# EAGLE board BR-Client-v1.0 (EAGLE 5.03)
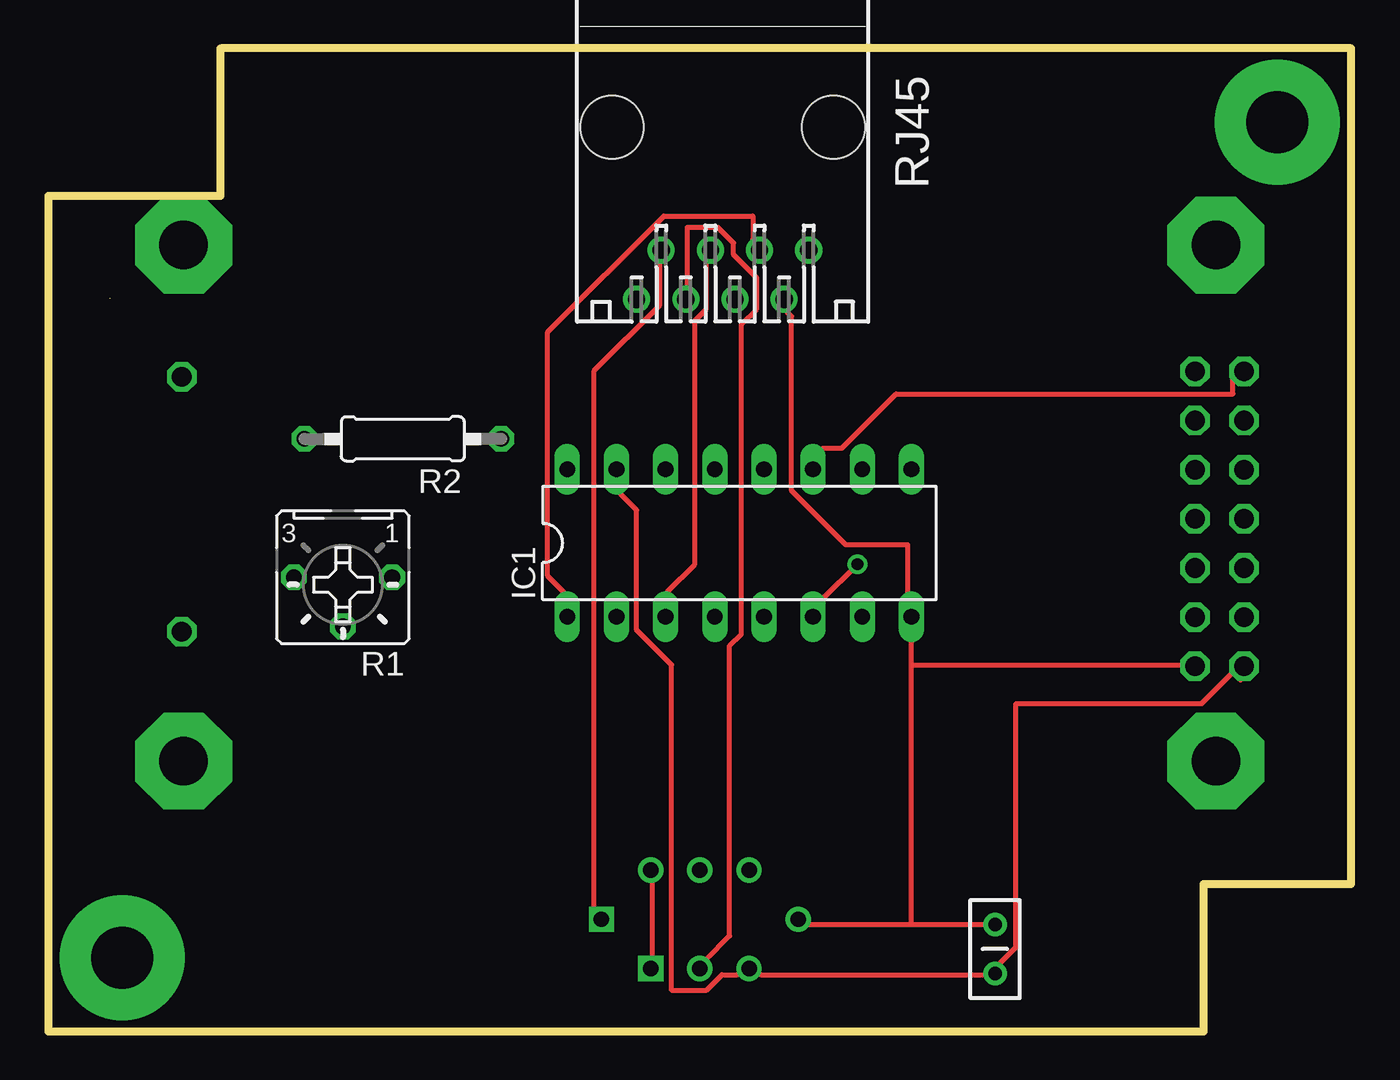
[diagram p0: board, top side]
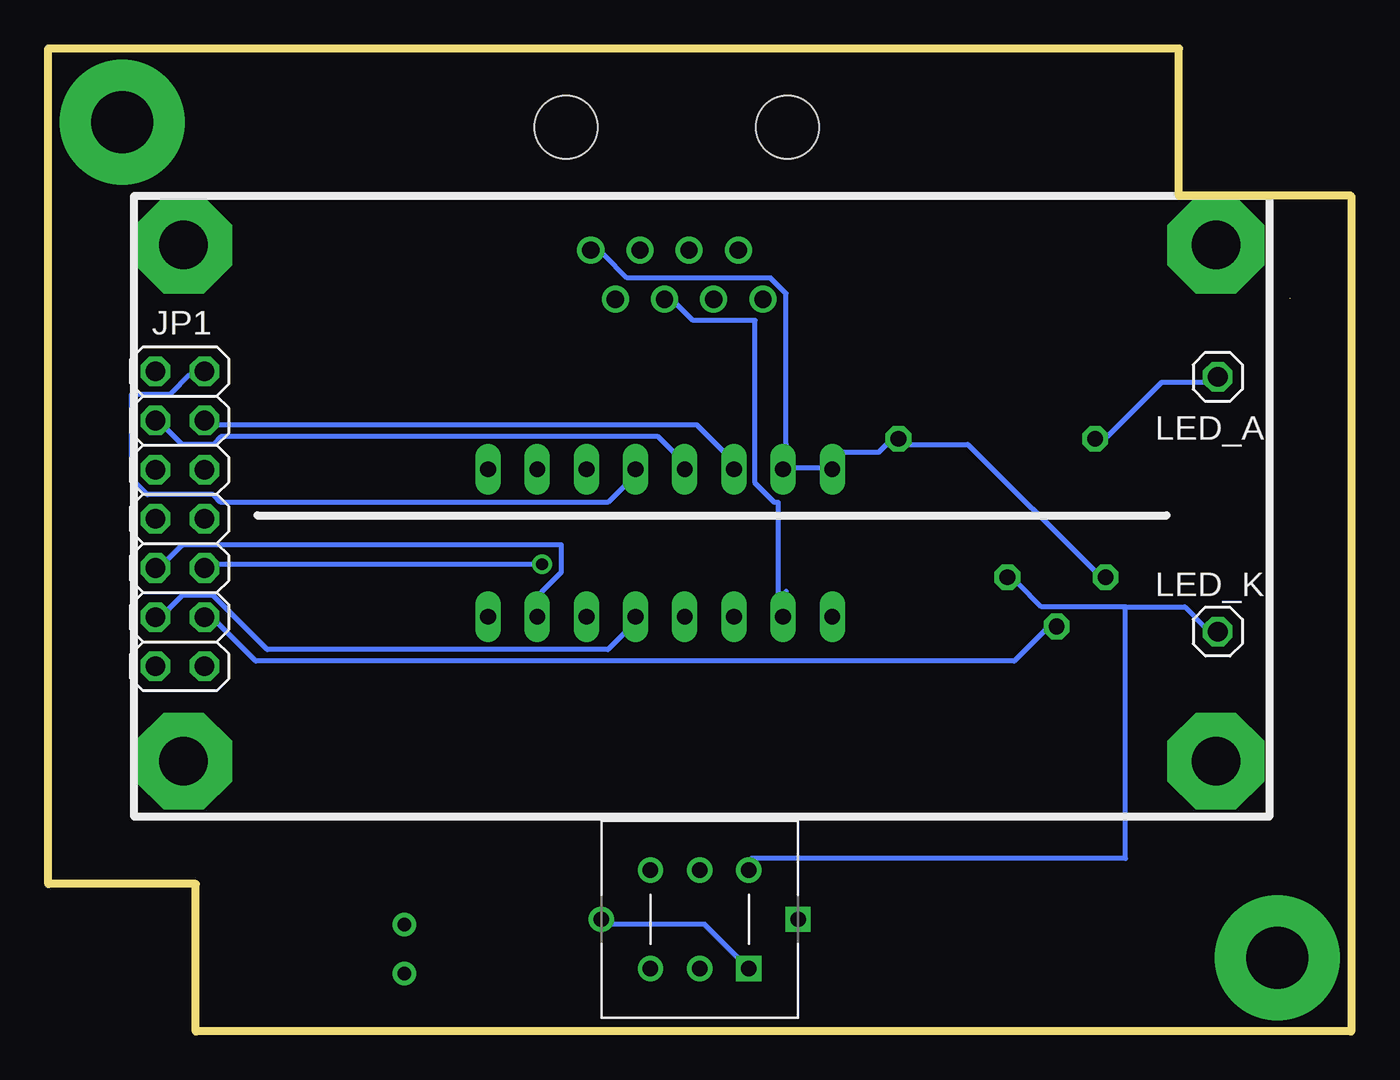
[diagram p1: board, bottom side, seen from below]

Size 67.31 x 50.8 mm. Coordinates in mm from the lower left corner, seen from the top.
Outline: 3.17,37.89 3.17,37.88
Outline: 0,43.18 8.89,43.18 8.89,50.8 67.31,50.8 67.31,7.62 59.69,7.62 59.69,0 0,0 0,43.18
Copper layers (1*16): Top 0.035mm / dielectric 1.5mm / Bottom 0.035mm
Design rules "default": minimum track width 10mil, minimum drill 24mil, track to track 8mil, track to pad 8mil, pad to pad 8mil, via to via 8mil, smd to smd 8mil, copper to edge 40mil, drill to drill 8mil, minimum pad ring 10mil, minimum via ring 8mil, stop-mask expansion 4mil, vias tented up to drill 0mil, thermal gap 10mil

## Footprints (pad centres in the part's own frame; a part is rotated, then mirrored left to right if it is on the bottom)
CAP-PTH-SMALL2 = drill 0.7 round: 1 0,0; 2 2.54,0
DIL16 = drill 0.813 long: 1 -8.89,-3.81; 2 -6.35,-3.81; 3 -3.81,-3.81; 4 -1.27,-3.81; 5 1.27,-3.81; 6 3.81,-3.81; 7 6.35,-3.81; 8 8.89,-3.81; 9 8.89,3.81; 10 6.35,3.81; 11 3.81,3.81; 12 1.27,3.81; 13 -1.27,3.81; 14 -3.81,3.81; 15 -6.35,3.81; 16 -8.89,3.81
2X07 = drill 1.016 octagon: 1 -7.62,-1.27; 2 -7.62,1.27; 3 -5.08,-1.27; 4 -5.08,1.27; 5 -2.54,-1.27; 6 -2.54,1.27; 7 0,-1.27; 8 0,1.27; 9 2.54,-1.27; 10 2.54,1.27; 11 5.08,-1.27; 12 5.08,1.27; 13 7.62,-1.27; 14 7.62,1.27
1X01 = drill 1.016 octagon: 1 0,0
PB613 = drill 0.8 square: 1 -2.54,2.54; L1 -5.08,0 | drill 0.8 round: 2 0,2.54; 3 2.54,2.54; 4 -2.54,-2.54; 5 0,-2.54; 6 2.54,-2.54; L2 5.08,0
B25P = drill 0.813 octagon: A -2.54,0; E 2.54,0; S 0,2.54
0207/10 = drill 0.813 octagon: 1 -5.08,0; 2 5.08,0
555164-1 = drill 0.889 round: 1 -4.445,5.207; 2 -3.175,7.747; 3 -1.905,5.207; 4 -0.635,7.747; 5 0.635,5.207; 6 1.905,7.747; 7 3.175,5.207; 8 4.445,7.747 | hole 3.251: -5.715,-1.143; 5.715,-1.143

## Placement (x,y rotation side)
C1  0.1mF  [CAP-PTH-SMALL2]  48.91,5.53 270 top
IC1  4094N  [DIL16]  35.7,25.24 0 top
JP1  [2X07]  60.51,26.49 90 bottom
LED_A  [1X01]  6.89,33.83 0 bottom
LED_K  [1X01]  6.89,20.66 0 bottom
LEDBTN  PB613DIP  [PB613]  33.66,5.8 180 bottom
R1  22k  [B25P]  15.22,23.47 180 top
R2  10k  [0207/10]  18.31,30.62 180 top
RJ45  [555164-1]  34.84,45.58 180 top

## Library data of the parts
C1 = SparkFun
IC1 = 40xx
JP1 LED_A LED_K = pinhead
LEDBTN = Vermut
R1 = pot
R2 = resistor
RJ45 = con-amp

## Nets
D4: IC1.14 JP1.11
D5: IC1.13 JP1.12
D6: IC1.12 JP1.13
D7: IC1.11 JP1.14
E: IC1.7 JP1.6
N$1: LEDBTN.2 RJ45.6
N$2: LEDBTN.L1 RJ45.7
N$3: LED_A.1 R2.2
N$10: IC1.1 RJ45.3
N$11: IC1.2 RJ45.4
N$12: IC1.3 RJ45.5
RS: IC1.5 JP1.4
RW: IC1.6 JP1.5
VDD: C1.2 IC1.15 IC1.16 JP1.2 LEDBTN.3 R1.E R2.1 RJ45.1
VSS: C1.1 IC1.8 JP1.1 LED_K.1 LEDBTN.1 LEDBTN.4 LEDBTN.L2 R1.A RJ45.2
VSTR: JP1.3 R1.S

## Tracks (layer width: path | path; a pad name or v marks a point on that pad's centre or on a via)
D4
  Bottom 0.254: IC1.14 32.4,29.94 33.8,31.34 58.6,31.34 JP1.11
D5
  Bottom 0.254: IC1.13 35,29.94 35.8,30.74 58.4,30.74 58.8,30.34 60.4,30.34 61.2,31.14 JP1.12
D6
  Bottom 0.254: IC1.12 37.6,28.14 38.4,27.34 58.4,27.34 58.8,27.74 62.2,27.74 63,28.54 63,32.94 61,32.94 60,33.94 JP1.13
D7
  Top 0.254: IC1.11 40,30.14 41,30.14 43.8,32.94 61.2,32.94 61.2,33.74 JP1.14
E
  Bottom 0.254: IC1.7 41.8,22.74 40.8,23.74 40.8,25.14 60.4,25.14 61.2,24.34 JP1.6
N$1
  Top 0.254: LEDBTN.2 34,3.74 35.2,4.94 35.2,19.94 35.8,20.54 35.8,36.54 36.6,37.34 36.6,38.94 35.4,40.14 35.4,40.74 34.6,41.54 33,41.54 33,38.34 RJ45.6
N$2
  Top 0.254: LEDBTN.L1 28.2,6.34 28.2,34.14 31.6,37.54 31.6,39.74 RJ45.7
N$3
  Bottom 0.254: R2.2 12.6,30.74 9.8,33.54 7.6,33.54 LED_A.1
N$4  (via drill 2.5 pad 5)
  other vias: 60.33,40.64
N$5  (via drill 2.5 pad 5)
  other vias: 60.33,13.97
N$6  (via drill 2.5 pad 5)
  other vias: 6.99,40.64
N$7  (via drill 2.5 pad 5)
  other vias: 6.99,13.97
N$9  (via drill 3.2 pad 6.45)
  other vias: 63.5,46.99
N$10
  Top 0.254: IC1.1 26.6,22.74 25.8,23.54 25.8,36.14 31.8,42.14 36.4,42.14 36.4,40.94 RJ45.3
N$11
  Bottom 0.254: 29.2,22.74 IC1.2 29.6,22.74 29.6,27.34 29.8,27.34 30.8,28.34 30.8,36.74 34,36.74 34.8,37.54 RJ45.4
N$12
  Top 0.254: IC1.3 32,22.74 33.4,24.14 33.4,36.74 34,37.34 34,39.74 RJ45.5
N$13  (via drill 3.2 pad 6.45)
  other vias: 3.81,3.81
RS
  Bottom 0.254: IC1.5 37.6,20.54 38.4,19.74 56,19.74 58.8,22.54 60.4,22.54 61.2,21.74 JP1.4
RW  (via drill 0.61)
  Top 0.254: v41.8,24.14 40,22.34 IC1.6
  Bottom 0.254: v41.8,24.14 58.6,24.14 JP1.5
VDD
  Top 0.254: 61.6,18.14 JP1.2 61.2,18.54 59.6,16.94 50,16.94 50,4.34 49.2,3.54 C1.2 48.4,2.94 36.8,2.94 LEDBTN.3 35.6,2.94 34.8,2.94 34,2.14 32.2,2.14 32.2,18.94 30.4,20.74 30.4,26.94 29.6,27.74 IC1.15
  Bottom 0.254: R1.E 13.2,23.74 19.8,30.34 22.8,30.34 R2.1 24,30.34 24.4,29.94 26.2,29.94 IC1.16 27.4,29.14 28.8,29.14 IC1.15 29.2,30.34 29.2,38.14 30,38.94 37.4,38.94 38.6,40.14 RJ45.1
VSS
  Top 0.254: LEDBTN.1 31.2,3.74 31.2,7.74 LEDBTN.4 | 44.6,5.54 39.2,5.54 LEDBTN.L2 | 44.6,5.54 48.4,5.54 C1.1 | 44.6,5.54 44.6,18.94 | 44.6,18.94 44.6,20.14 IC1.8 44.4,22.74 44.4,25.14 41.2,25.14 38.4,27.94 38.4,36.94 38.2,37.14 RJ45.2 | 44.6,18.94 58.6,18.94 JP1.1
  Bottom 0.254: 11.66,21.94 16,21.94 17.2,23.14 R1.A | LEDBTN.1 31.6,3.74 33.4,5.54 38.2,5.54 LEDBTN.L2 | 11.66,21.94 11.66,8.94 31,8.94 LEDBTN.4 | 11.66,21.94 8.6,21.94 7.6,20.94 LED_K.1
VSTR
  Bottom 0.254: R1.S 15.8,20.74 17.4,19.14 56.6,19.14 58.6,21.14 JP1.3